# Altium PCB BEE-DAL_EXP_V1.0.PcbDoc (part 5 of 5)
Units mm, origin at the board's own origin, x right, y up, seen from the top; angles counter-clockwise.
Board outline 93 x 90 mm, 6 copper layers (L1_TOP, L2_GND, L3_SIGNAL, L4_PWR, L5_GND, L6_BOT), stack 1.608 mm thick; 548 components, 447 nets, 1827 pads, 1131 vias.
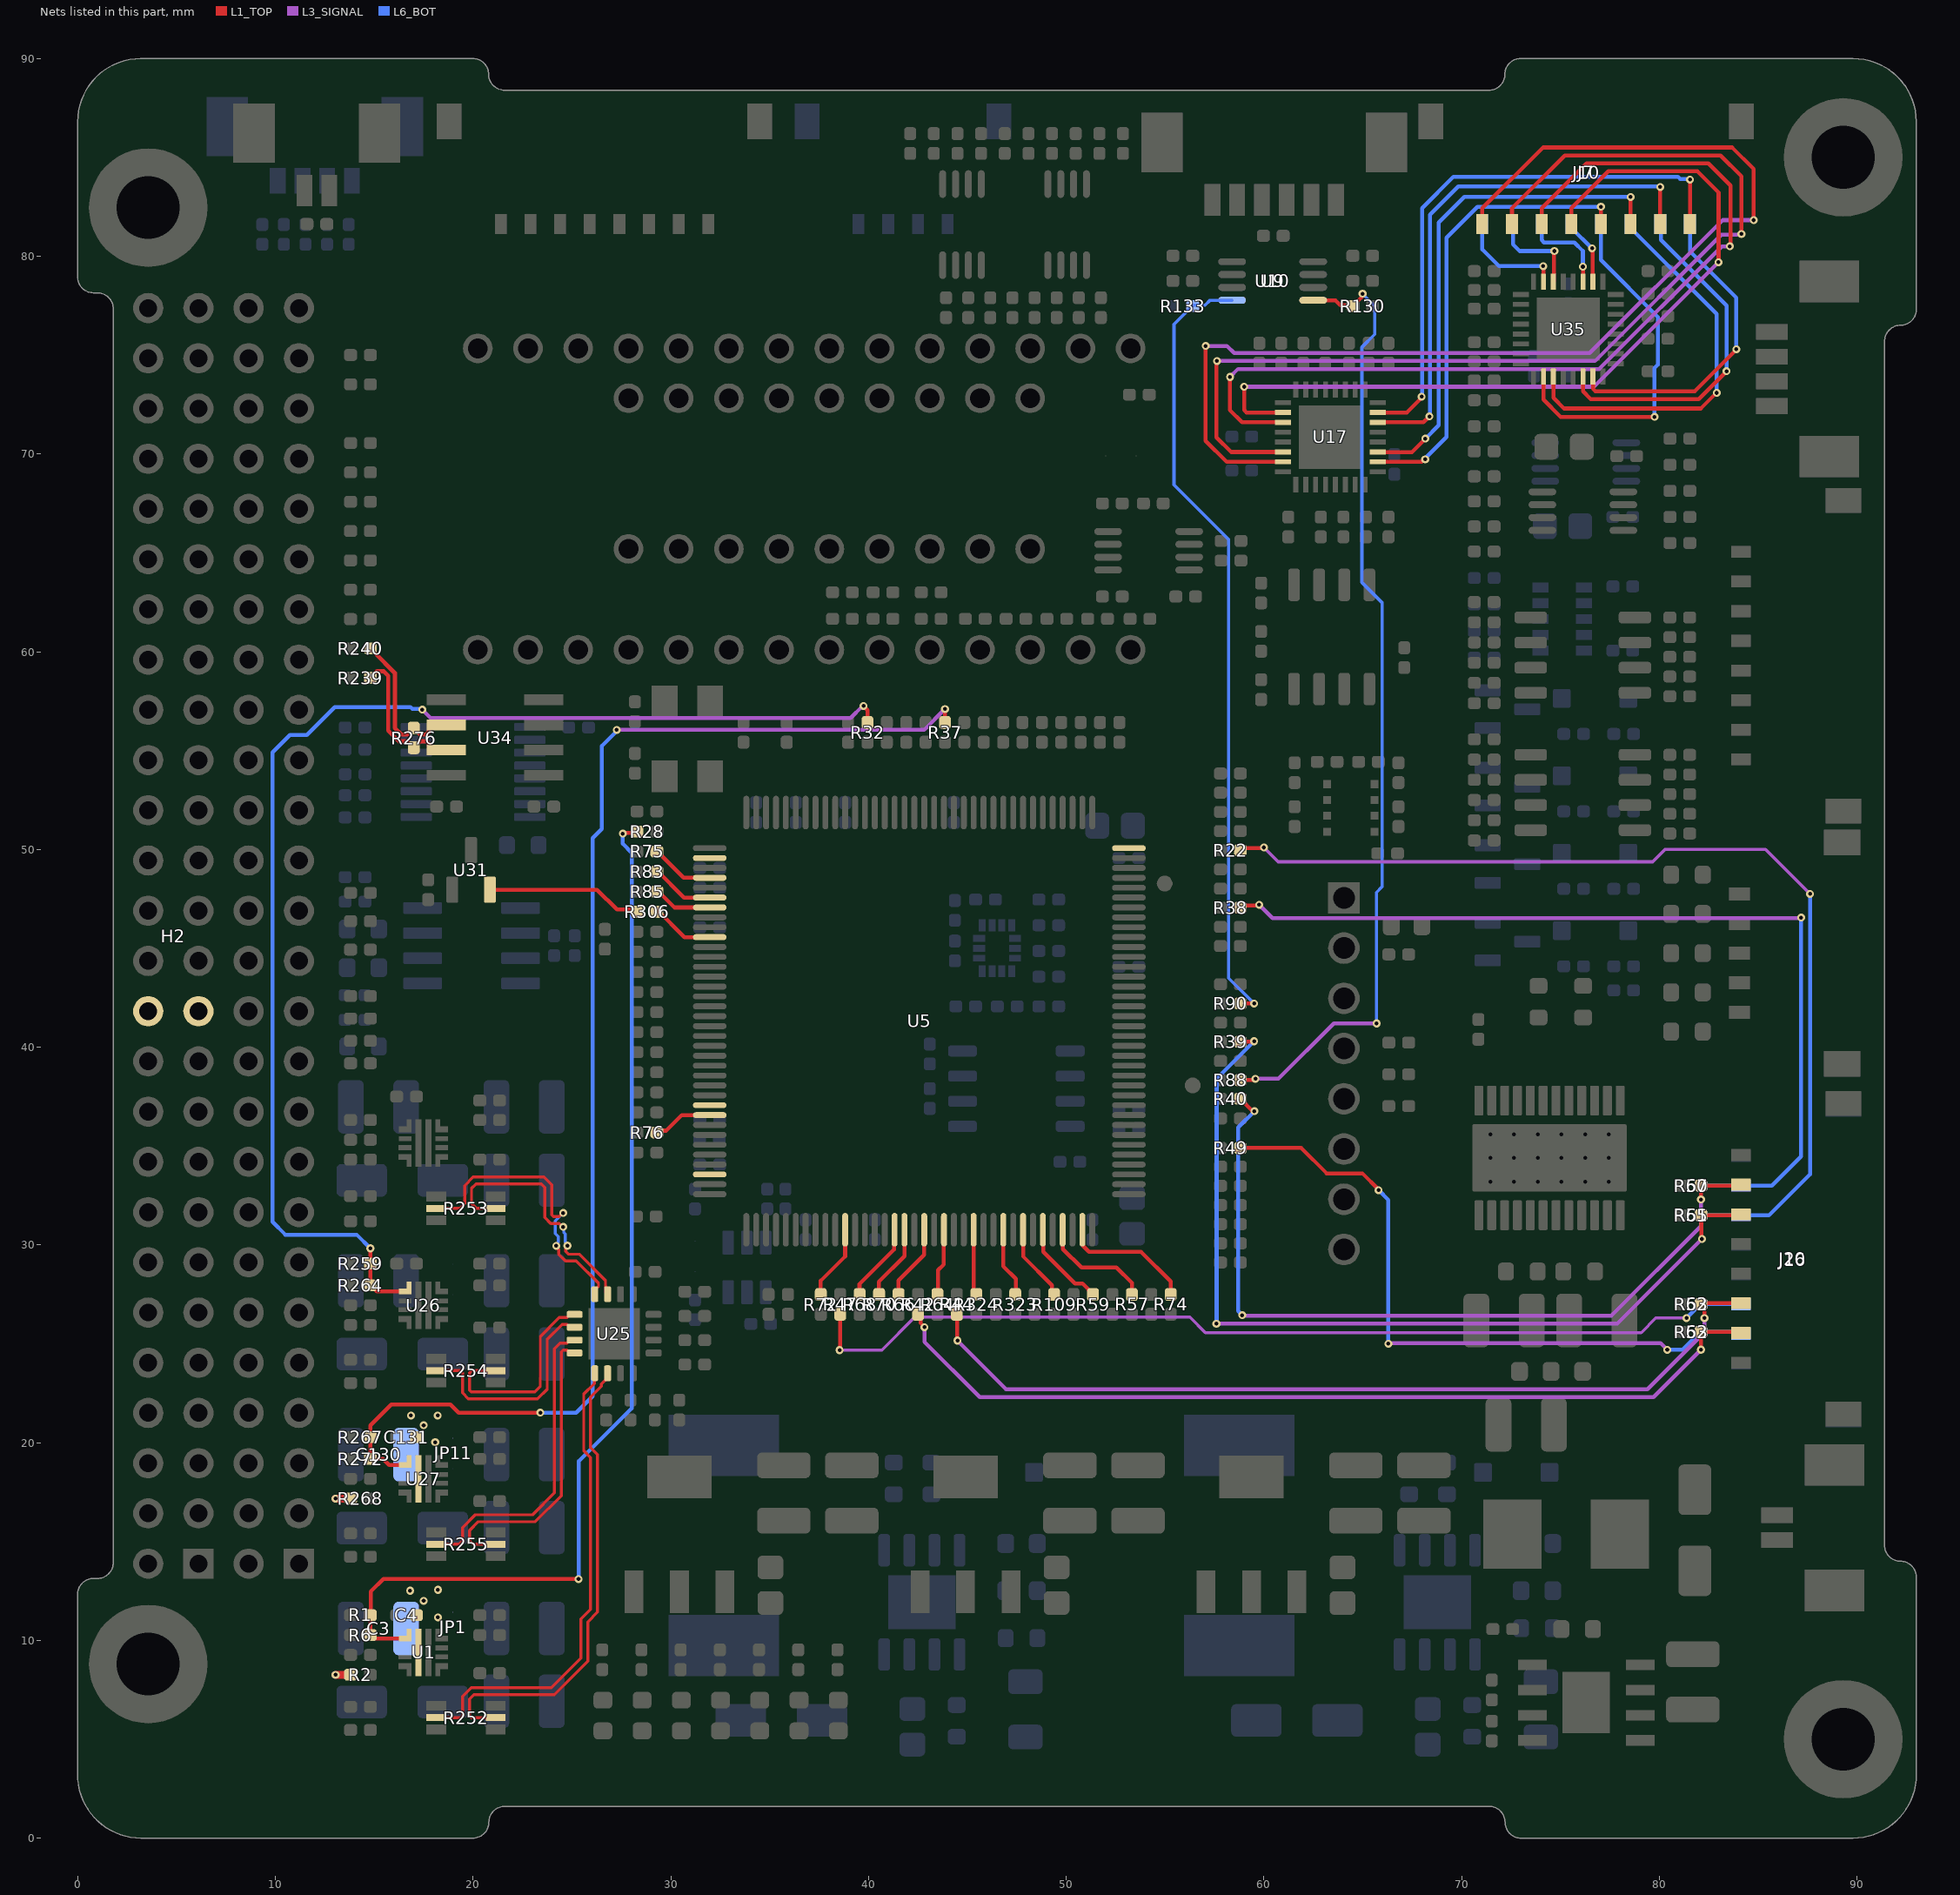
[diagram p9: the nets of this part, all layers, seen from the top]

## Via types
v1: diameter 0.4, hole 0.2, L1_TOP to L6_BOT, tented both sides, 1121 vias
v2: diameter 0.6, hole 0.3, L1_TOP to L6_BOT, tented both sides, 10 vias

## Nets (pads, with @x,y where several pads share a name; then routed paths per layer and width w, separated by ;. In a path a pad name is that pad's centre, name@x,y a point inside that pad or via, vN(x,y) a via of type N, cw(c..) or ccw(c..) an arc to the next point about the centre after c; other vN are vias at no path point) (continued)
PD18: R57.2 U5.69 | length 5.8
  L1_TOP w0.2: U5.69@49.822,30.764 49.841,30.745 49.841,29.786 50.772,28.855 52.545,28.855 53.324,28.076 R57.2@53.324,27.49
PD19: R59.1 U5.67 | length 4.5
  L1_TOP w0.2: U5.67@48.822,30.764 48.841,30.745 48.841,29.655 50.455,28.04 50.832,28.04 51.357,27.515 R59.1@51.357,27.49
PD20: R109.2 U5.65 | length 3.9
  L1_TOP w0.2: U5.65@47.822,30.764 47.822,29.419 49.289,27.951 49.289,27.591 R109.2@49.39,27.49
PD21: R323.2 U5.63 | length 3.5
  L1_TOP w0.2: U5.63@46.822,30.764 46.822,28.915 47.45,28.287 R323.2@47.45,27.49
PD22: R324.1 U5.60 | length 3.3
  L1_TOP w0.2: U5.60@45.322,30.764 45.322,27.625 R324.1@45.456,27.49
PD23: R64.2 U5.57 | length 3.4
  L1_TOP w0.2: R64.2@43.44,27.49 43.52,27.571 43.52,28.72 43.802,29.003 43.802,30.745 U5.57@43.822,30.764
PD24: R66.2 U5.55 | length 3.8
  L1_TOP w0.2: R66.2@41.522,27.49 41.522,28.192 42.822,29.491 U5.55@42.822,30.764
PD25: R68.2 U5.52 | length 4
  L1_TOP w0.2: R68.2@39.548,27.49 39.548,28.016 41.302,29.77 41.302,30.745 U5.52@41.322,30.764
PD26: R70.2 U5.53 | length 3.8
  L1_TOP w0.2: R70.2@40.529,27.49 40.529,28.141 41.822,29.434 U5.53@41.822,30.764
PD27: R72.2 U5.47 | length 3.8
  L1_TOP w0.2: R72.2@37.588,27.49 37.588,28.187 38.822,29.42 U5.47@38.822,30.764
PD28: R74.2 U5.71 | length 6.7
  L1_TOP w0.2: U5.71@50.822,30.764 50.841,30.745 50.841,29.966 51.152,29.655 53.784,29.655 55.291,28.148 R74.2@55.291,27.49
PD29: U5.108
PD30: U5.34
PD31: U5.2
PE00: R75.2 U5.4 | length 3.3
  L1_TOP w0.2: R75.2@29.283,49.927 30.646,48.564 U5.4@31.972,48.564
PE01: R83.2 U5.6 | length 3.3
  L1_TOP w0.2: R83.2@29.27,48.941 29.295,48.941 30.671,47.564 U5.6@31.972,47.564
PE02: R85.2 U5.7 | length 3.1
  L1_TOP w0.2: R85.2@29.27,47.951 29.295,47.951 30.182,47.064 U5.7@31.972,47.064
PE03: R306.2 U5.10 | length 3.3
  L1_TOP w0.2: R306.2@29.27,46.961 29.295,46.961 30.692,45.564 U5.10@31.972,45.564
PE04: U5.27
PE05: R76.2 U5.28 | length 3.1
  L1_TOP w0.2: R76.2@29.27,35.672 29.376,35.778 29.764,35.778 30.55,36.564 U5.28@31.972,36.564
PM-L25_1_DARK_ON: J20.3 R44.2 R63.1 | length 44.9
  L1_TOP w0.2: R44.2@44.472,26.49 44.486,26.477 44.486,25.174 v1(44.5,25.16) ; v1(82.284,26.3) 82.284,26.825 R63.1@82.109,27 82.157,27.048 J20.3@84.13,27.048
  L3_SIGNAL w0.2: v1(44.5,25.16) 46.96,22.7 79.4,22.7 82.284,25.584 v1(82.284,26.3)
PM-L25_1_LIGHT_ON: J20.2 R42.2 R62.1 | length 45.9
  L1_TOP w0.2: R42.2@42.506,26.49 42.63,26.366 42.63,26.053 42.827,25.856 v1(42.827,25.836) ; v1(82.109,24.7) R62.1@82.109,25.598 84.08,25.598 J20.2@84.13,25.548
  L3_SIGNAL w0.2: v1(42.827,25.836) 42.827,25.1 45.627,22.3 79.709,22.3 v1(82.109,24.7)
PM-L25_2_DARK_ON: J20.7 R40.1 R67.1 | length 40.9
  L1_TOP w0.2: R40.1@58.808,37.39 59.437,36.761 v1(59.523,36.761) ; v1(82.109,32.3) R67.1@82.109,33 84.082,33 J20.7@84.13,33.048
  L3_SIGNAL w0.2: v1(58.901,26.442) 58.918,26.425 77.581,26.425 82.109,30.953 v1(82.109,32.3)
  L6_BOT w0.2: v1(58.901,26.442) 58.901,26.459 58.7,26.659 58.7,35.939 v1(59.523,36.761)
PM-L25_2_LIGHT_ON: J20.6 R39.1 R65.1 | length 45.4
  L1_TOP w0.2: R39.1@58.808,40.27 59.474,40.27 v1(59.504,40.3) ; v1(82.157,30.3) 82.133,30.324 82.133,31.476 R65.1@82.109,31.5 84.082,31.5 J20.6@84.13,31.548
  L3_SIGNAL w0.2: v1(57.6,26.017) 77.874,26.017 v1(82.157,30.3)
  L6_BOT w0.2: v1(57.6,26.017) 57.612,26.029 57.612,38.408 v1(59.504,40.3)
PM-U25_1_DARK_ON: J16.3 R22.1 R51.1 | length 50.9
  L1_TOP w0.2: R22.1@58.808,49.962 58.907,50.062 59.962,50.062 v1(60,50.1)
  L3_SIGNAL w0.16: v1(60,50.1) 60.723,49.377 79.664,49.377 80.292,50.005 85.372,50.005 v1(87.625,47.752)
  L6_BOT w0.2: R51.1@82.109,31.5 J16.3@84.13,31.5 85.55,31.5 87.625,33.575 v1(87.625,47.752)
PM-U25_1_LIGHT_ON: J16.2 R38.1 R50.1 | length 46.5
  L1_TOP w0.2: R38.1@58.808,47.055 58.92,47.166 59.72,47.166 v1(59.758,47.205)
  L3_SIGNAL w0.2: v1(59.758,47.205) 60.438,46.525 87.143,46.525 v1(87.175,46.557)
  L6_BOT w0.2: R50.1@82.109,33 J16.2@84.13,33 85.7,33 87.175,34.475 v1(87.175,46.557)
PM-U25_2_DARK_ON: J16.7 R49.2 R53.1 | length 34.3
  L1_TOP w0.2: R49.2@58.808,34.9 61.894,34.9 63.174,33.62 64.981,33.62 65.8,32.801 v1(65.8,32.768)
  L3_SIGNAL w0.2: v1(66.3,25) 66.338,25.038 80.059,25.038 v1(80.405,24.692)
  L6_BOT w0.2: v1(65.8,32.768) 66.3,32.268 v1(66.3,25) ; v1(80.405,24.692) 80.413,24.7 81.186,24.7 82.084,25.598 R53.1@82.109,25.598 84.032,25.598 J16.7@84.13,25.5
PM-U25_2_LIGHT_ON: J16.6 R47.2 R52.1 | length 49
  L1_TOP w0.2: v1(38.541,24.678) 38.568,24.704 R47.2@38.568,26.49
  L3_SIGNAL w0.15: v1(38.541,24.678) 40.678,24.678 42.343,26.343 56.257,26.343 57.038,25.562 79.085,25.562 79.823,26.3 v1(81.38,26.3)
  L6_BOT w0.2: v1(81.38,26.3) 81.382,26.3 82.082,27 J16.6@84.13,27
POW_ONOFF_MOTOR: R37.1 R267.2 R272.1 U27.1 | length 67.7
  L1_TOP w0.2: U27.1@16.565,18.867 15.751,18.867 15.446,19.172 R272.1@14.805,19.172 R267.2@14.805,20.272 14.805,20.872 15.863,21.93 18.85,21.93 19.268,21.512 v1(23.4,21.512) ; v1(43.871,57.105) 43.871,56.641 43.978,56.534 R37.1@43.99,56.534
  L3_SIGNAL w0.2: v1(27.269,56.042) 42.809,56.042 v1(43.871,57.105)
  L6_BOT w0.2: v1(23.4,21.512) 25.212,21.512 26.044,22.344 26.044,50.572 26.509,51.037 26.509,55.229 27.269,55.988 v1(27.269,56.042)
POW_ONOFF_SLN_HD: R32.1 R259.2 R264.1 U26.1 | length 65.3
  L1_TOP w0.2: v1(14.805,29.825) R259.2@14.805,29.051 R264.1@14.805,27.951 14.83,27.951 15.135,27.646 U26.1@16.565,27.646 ; v1(39.748,57.254) 39.748,57.247 39.952,57.044 R32.1@39.952,56.42
  L3_SIGNAL w0.2: v1(17.431,57.068) 17.433,57.068 17.856,56.645 39.093,56.645 39.702,57.254 v1(39.748,57.254)
  L6_BOT w0.2: v1(14.805,29.825) 14.113,30.517 10.503,30.517 9.85,31.17 9.85,54.9 10.744,55.794 11.594,55.794 13,57.2 16.831,57.2 16.931,57.1 17.399,57.1 v1(17.431,57.068)
POW_ONOFF_STX_12V: R1.2 R6.1 R28.1 U1.1 | length 54.6
  L1_TOP w0.2: U1.1@16.565,10.091 15.02,10.091 14.844,10.268 R6.1@14.805,10.268 R1.2@14.805,11.273 14.835,11.303 14.835,12.475 15.46,13.1 v1(25.335,13.1) ; v1(27.576,50.8) 27.614,50.838 28.181,50.838 R28.1@28.27,50.927
  L6_BOT w0.2: v1(25.335,13.1) 25.355,13.12 25.355,19.069 28.025,21.739 28.025,49.831 27.576,50.28 v1(27.576,50.8)
RS_485_N: R239.1 R276.1 U34.7 | length 7.6
  L1_TOP w0.211: R239.1@14.805,58.68 14.814,58.68 15.148,59.015 15.477,59.015 15.708,58.783 15.708,56.007 16.243,55.471 16.682,55.471 R276.1@17,55.153 ; R276.1@17,55.14 R276.1@17,55.153 ; U34.7@18.654,55.025 17.934,55.025 17.769,55.19 17.769,55.347 17.645,55.471 17.318,55.471 R276.1@17,55.153
RS_485_P: R240.2 R276.2 U34.6 | length 7.9
  L1_TOP w0.211: R240.2@14.805,60.164 15.024,59.946 16.046,58.923 16.046,56.147 16.383,55.809 16.682,55.809 R276.2@17,56.127 ; R276.2@17,56.14 R276.2@17,56.127 ; U34.6@18.654,56.295 17.937,56.295 17.772,56.13 17.772,55.953 17.628,55.809 17.318,55.809 R276.2@17,56.127
SENSE_5V_EXP_N: R253.4 U25.7 | length 13.3
  L1_TOP w0.15: R253.4@21.143,31.846 20.164,31.846 19.923,32.088 19.923,32.857 20.152,33.086 23.447,33.086 23.633,32.9 23.633,31.38 23.926,31.087 24.347,31.087 24.524,30.91 v1(24.56,30.91) ; v1(24.775,29.959) 24.775,29.892 24.679,29.796 24.679,29.672 24.82,29.531 25.367,29.531 26.698,28.2 26.698,27.921 26.715,27.904 26.715,27.601 U25.7@26.808,27.508
  L6_BOT w0.15: v1(24.56,30.91) 24.588,30.882 24.588,30.637 24.667,30.557 24.667,30.134 24.775,30.027 v1(24.775,29.959)
SENSE_5V_EXP_P: R253.3 U25.8 | length 15.1
  L1_TOP w0.15: R253.3@18.143,31.846 19.332,31.846 19.573,32.088 19.573,33.002 20.007,33.436 23.592,33.436 23.983,33.045 23.983,31.525 24.071,31.437 24.347,31.437 24.524,31.614 v1(24.56,31.614) ; v1(24.21,29.954) 24.21,29.886 24.329,29.767 24.329,29.527 24.675,29.181 25.222,29.181 26.348,28.055 26.348,27.921 26.158,27.731 U25.8@26.158,27.508
  L6_BOT w0.15: v1(24.21,29.954) 24.21,30.021 24.317,30.129 24.317,30.412 24.16,30.569 24.16,31.214 v1(24.56,31.614)
SENSE_5V_MOTOR_N: R255.4 U25.12 | length 15.3
  L1_TOP w0.15: R255.4@21.143,14.859 19.993,14.859 19.818,15.034 19.818,15.559 20.259,16 23.155,16 24.464,17.309 24.464,24.595 24.551,24.683 24.751,24.683 24.901,24.533 U25.12@25.133,24.533
SENSE_5V_MOTOR_P: R255.3 U25.11 | length 15.9
  L1_TOP w0.15: R255.3@18.143,14.859 19.293,14.859 19.468,15.034 19.468,15.704 20.114,16.35 23.01,16.35 24.114,17.454 24.114,24.74 24.406,25.033 24.751,25.033 24.901,25.183 U25.11@25.133,25.183
SENSE_5V_SLN_HD_N: R254.4 U25.9 | length 10.7
  L1_TOP w0.15: R254.4@21.143,23.638 19.924,23.638 19.818,23.532 19.818,22.658 19.906,22.57 23.119,22.57 23.4,22.851 23.4,25.371 24.363,26.333 24.751,26.333 24.901,26.483 U25.9@25.133,26.483
SENSE_5V_SLN_HD_P: R254.3 U25.10 | length 11.3
  L1_TOP w0.15: R254.3@18.143,23.638 19.362,23.638 19.468,23.532 19.468,22.513 19.761,22.22 23.264,22.22 23.75,22.706 23.75,25.226 24.508,25.983 24.751,25.983 24.901,25.833 U25.10@25.133,25.833
SENSE_12V_EXP_N: R252.4 U25.14 | length 24.3
  L1_TOP w0.15: R252.4@21.143,6.09 19.906,6.09 19.818,6.178 19.818,7.026 20.047,7.255 24.105,7.255 25.801,8.951 25.801,10.928 26.297,11.425 26.297,19.397 25.947,19.747 25.947,22.305 26.486,22.843 26.486,22.956 26.808,23.277 U25.14@26.808,23.508
SENSE_12V_EXP_P: R252.3 U25.13 | length 24.1
  L1_TOP w0.15: R252.3@18.143,6.09 19.38,6.09 19.468,6.178 19.468,7.171 19.902,7.605 23.96,7.605 25.451,9.096 25.451,11.073 25.947,11.57 25.947,19.253 25.597,19.603 25.597,22.45 26.136,22.988 26.136,23.486 U25.13@26.158,23.508
SENSOR1_EN: R88.2 R130.1 U9.5 | length 49
  L1_TOP w0.2: R88.2@58.808,38.332 59.453,38.332 59.521,38.4 v1(59.575,38.4) ; U9.5@62.495,77.775 63.619,77.775 63.875,77.519 64.456,77.519 R130.1@64.5,77.475 64.955,77.93 64.955,78.062 v1(64.993,78.1)
  L3_SIGNAL w0.2: v1(59.575,38.4) 60.735,38.4 63.535,41.2 v1(65.7,41.2)
  L6_BOT w0.16: v1(64.993,78.1) 65.612,77.482 65.612,76.052 64.958,75.398 64.958,63.503 65.975,62.486 65.975,48.104 65.7,47.829 v1(65.7,41.2)
SENSOR2_EN: R90.2 R133.1 U10.5 | length 40.2
  L1_TOP w0.2: R90.2@58.808,42.209 v1(59.504,42.209)
  L6_BOT w0.16: U10.5@58.395,77.775 57.276,77.775 57.025,77.524 56.449,77.524 R133.1@56.4,77.475 56.375,77.475 55.456,76.556 55.456,68.444 58.22,65.68 58.22,43.493 v1(59.504,42.209)
SOLE1_OUT1: J10.1 U17.31 | length 28.6
  L1_TOP w0.2: U17.31@65.771,72.1 67.229,72.1 67.975,72.846 v1(67.975,72.9) ; J10.1@81.55,81.63 v1(81.55,83.875)
  L6_BOT w0.2: v1(67.975,72.9) 68,72.925 68,82.43 69.595,84.025 80.95,84.025 81.062,83.913 81.512,83.913 v1(81.55,83.875)
SOLE1_OUT2: J10.2 U17.30 | length 27.1
  L1_TOP w0.2: U17.30@65.771,71.6 68.075,71.6 v1(68.375,71.9) ; J10.2@80.05,81.63 v1(80.05,83.5)
  L6_BOT w0.2: v1(68.375,71.9) 68.4,71.925 68.4,82.1 69.838,83.538 80.012,83.538 v1(80.05,83.5)
SOLE2_OUT1: J10.3 U17.27 | length 25.5
  L1_TOP w0.2: U17.27@65.771,70.1 65.774,70.096 67.489,70.096 v1(68.168,70.775) ; J10.3@78.55,81.63 v1(78.55,83)
  L6_BOT w0.2: v1(68.168,70.775) 68.843,71.45 68.843,81.709 70.134,83 v1(78.55,83)
SOLE2_OUT2: J10.4 U17.26 | length 23.4
  L1_TOP w0.2: U17.26@65.771,69.6 67.978,69.6 68.105,69.727 v1(68.159,69.727) ; J10.4@77.05,81.63 v1(77.05,82.5)
  L6_BOT w0.2: v1(68.159,69.727) 68.159,69.778 69.243,70.863 69.243,80.942 70.802,82.5 v1(77.05,82.5)
SOLE3_OUT1: J10.5 U17.10 | length 42.8
  L1_TOP w0.2: v1(59,73.4) 59,72.217 59.117,72.1 U17.10@60.97,72.1 ; J10.5@75.55,81.63 75.55,82.43 77.42,84.3 81.924,84.3 83,83.224 v1(82.999,79.7) v1(82.999,79.7)
  L3_SIGNAL w0.2: v1(59,73.4) 76.699,73.4 v1(82.999,79.7)
SOLE3_OUT2: J10.6 U17.11 | length 47.5
  L1_TOP w0.2: v1(58.287,73.897) 58.287,72.213 58.9,71.6 U17.11@60.97,71.6 ; J10.6@74.05,81.63 74.05,82.43 76.32,84.7 82.476,84.7 83.6,83.576 83.6,80.535 v1(83.565,80.5)
  L3_SIGNAL w0.2: v1(58.287,73.897) 58.69,74.3 76.961,74.3 83.161,80.5 v1(83.565,80.5)
SOLE4_OUT1: J10.7 U17.14 | length 53.6
  L1_TOP w0.2: v1(57.625,74.7) 57.6,74.675 57.6,70.842 58.342,70.1 U17.14@60.97,70.1 ; J10.7@72.55,81.63 72.55,82.43 75.22,85.1 83.101,85.1 84.155,84.046 v1(84.155,81.13)
  L3_SIGNAL w0.2: v1(57.625,74.7) 76.75,74.7 83.142,81.092 84.117,81.092 v1(84.155,81.13)
SOLE4_OUT2: J10.8 U17.15 | length 58.7
  L1_TOP w0.2: v1(57.054,75.465) 57.054,70.665 58.119,69.6 U17.15@60.97,69.6 ; J10.8@71.05,81.63 71.05,82.43 74.12,85.5 83.684,85.5 84.78,84.404 v1(84.78,81.826)
  L3_SIGNAL w0.2: v1(57.054,75.465) 58.135,75.465 58.5,75.1 76.478,75.1 83.204,81.826 v1(84.78,81.826)
SOLE5_OUT1: J7.1 U35.31 | length 5.5
  L1_TOP w0.2: v1(74.127,79.496) 74.135,79.488 74.135,78.725 U35.31@74.143,78.717
  L6_BOT w0.2: J7.1@71.05,81.63 71.05,80.35 71.904,79.496 v1(74.127,79.496)
SOLE5_OUT2: J7.2 U35.30 | length 4.7
  L1_TOP w0.2: U35.30@74.643,78.717 74.669,78.742 74.669,80.239 v1(74.694,80.265)
  L6_BOT w0.2: J7.2@72.6,81.5 72.603,81.497 72.603,80.597 72.935,80.265 v1(74.694,80.265)
SOLE6_OUT1: J7.3 U35.27 | length 4.7
  L1_TOP w0.2: v1(76.135,79.471) 76.139,79.467 76.139,78.721 U35.27@76.143,78.717
  L6_BOT w0.2: J7.3@74.05,81.63 74.053,81.627 74.053,80.822 74.174,80.7 75.7,80.7 76.135,80.265 v1(76.135,79.471)
SOLE6_OUT2: J7.4 U35.26 | length 3.4
  L1_TOP w0.2: v1(76.6,80.4) 76.622,80.378 76.622,78.738 U35.26@76.643,78.717
  L6_BOT w0.2: J7.4@75.55,81.63 75.55,81.43 76.58,80.4 v1(76.6,80.4)
SOLE7_OUT1: J7.5 U35.10 | length 18.2
  L1_TOP w0.2: U35.10@74.143,73.916 74.143,72.746 75.015,71.875 v1(79.76,71.875)
  L6_BOT w0.2: J7.5@77.05,81.63 77.05,79.805 79.935,76.921 79.935,74.519 79.76,74.344 v1(79.76,71.875)
SOLE7_OUT2: J7.6 U35.11 | length 20.2
  L1_TOP w0.2: U35.11@74.643,73.916 74.643,72.833 75.176,72.3 82.1,72.3 82.891,73.091 v1(82.909,73.091)
  L6_BOT w0.2: J7.6@78.55,81.63 78.55,81.43 82.9,77.08 82.9,73.1 v1(82.909,73.091)
SOLE8_OUT1: J7.7 U35.14 | length 17.3
  L1_TOP w0.2: U35.14@76.143,73.916 76.143,73.167 76.532,72.778 81.995,72.778 v1(83.4,74.183)
  L6_BOT w0.2: J7.7@80.08,81.4 80.08,80.82 83.4,77.5 v1(83.4,74.183)
SOLE8_OUT2: J7.8 U35.15 | length 16.1
  L1_TOP w0.2: U35.15@76.643,73.916 76.643,73.295 76.761,73.178 81.794,73.178 83.9,75.284 v1(83.9,75.3)
  L6_BOT w0.2: J7.8@81.55,81.63 81.55,80.25 83.9,77.9 v1(83.9,75.3)
STX_12V: C3.2 C4.2 C130.2 C131.2 H2.23 H2.24 JP1.1 JP11.1 R2.2 R268.2 U1.5 U27.5 | length 1.5
  L1_TOP w0.4: v1(13.04,17.172) R268.2@13.805,17.172 ; v1(13.045,8.258) R2.2@13.805,8.258
  other v1: 18.224,11.163 17.503,12 16.815,12.51 18.224,12.557 18.087,20.016 17.503,20.875 16.859,21.373 18.212,21.373
"TEMP _SENSOR": R306.1 U31.2 | length 7.8
  L1_TOP w0.2: U31.2@20.85,47.962 26.273,47.962 27.274,46.961 R306.1@28.27,46.961
pads on no net: H1.02 H1.04 H1.05 H1.06 H1.07 H1.08 H1.09 H1.10 H1.11 H1.12 H1.13 H1.14 H1.15 H1.16 H1.17 H1.18 H1.19 H1.20 H1.28 H1.29 H1.30 H1.31 H1.32 H1.33 H1.34 H1.35 H1.36 H1.40 H1.42 H1.45 H1.48 H1.50 H1.51 H1.52 H2.01 H2.02 H2.03 H2.04 H2.05 H2.06 H2.07 H2.08 H2.09 H2.10 H2.11 H2.12 H2.13 H2.14 H2.15 H2.16 H2.17 H2.18 H2.19 H2.20 H2.21 H2.22 H2.27 H2.28 H2.33 H2.34 H2.35 H2.36 H2.37 H2.38 H2.39 H2.40 H2.41 H2.42 H2.43 H2.44 H2.45 H2.46 H2.49 H2.50 H2.51 H2.52 J2.1 J2.7 J4.6 J5.6 U4.7 U4.9 U5.136 U5.137 U7.8 U7.10 U11.1 U11.2 U11.4 U11.5 U11.6 U11.17 U11.18 U14.4 U14.10 U14.11 U15.23 U15.24 U15.25 U15.26 U17.8 U17.17 U18.4 U19.4 U20.17 U20.18 U33.2 U33.3 U33.5 U35.8 U35.17

## Polygon pours and split planes (outlines as drawn)
GND on L1_TOP "L1_GND" (solid, remove dead copper, pour order 265): 0,12.33 cw(c0.8,12.33) 0.8,13.13 1,13.13 ccw(c1,13.93) 1.8,13.93 1.8,77.35 ccw(c1,77.35) 1,78.15 0.8,78.15 cw(c0.8,78.95) 0,78.95 0,86.8 cw(c3.2,86.8) 3.193,90 3.175,90 19.989,90 cw(c19.989,89.2) 20.789,89.2 ccw(c21.589,89.2) 21.589,88.4 21.59,88.399 42.015,88.4 71.399,88.4 71.389,88.4 ccw(c71.389,89.2) 72.189,89.2 cw(c72.989,89.2) 72.989,90 89.789,90 89.807,90 cw(c89.8,86.8) 93,86.807 93,77.307 cw(c92.2,77.307) 92.2,76.507 ccw(c92.2,75.707) 91.4,75.707 91.4,14.8 ccw(c92.2,14.8) 92.2,14 cw(c92.2,13.2) 93,13.2 93,3.2 cw(c89.8,3.2) 89.8,0 73,0 cw(c73,0.8) 72.2,0.8 ccw(c71.4,0.8) 71.4,1.6 71.399,1.6 50.975,1.6 21.59,1.6 21.6,1.6 ccw(c21.6,0.8) 20.8,0.8 cw(c20,0.8) 20,0 3.2,0 cw(c3.2,3.2) 0,3.2
12V_EXP on L1_TOP "NONET_L-01_P-001" (solid, pour order 87): 20.643,6.94 22.66,6.94 cw(c22.66,6.512) 23.088,6.512 23.088,4.618 cw(c22.69,4.618) 22.69,4.22 20.952,4.22 cw(c20.952,4.529) 20.643,4.529
5V_SLN_HD on L1_TOP "NONET_L-01_P-001" (solid, pour order 129): 20.643,23.988 20.643,24.488 23.122,24.488 23.18,24.43 23.18,22.909 23.058,22.788 20.643,22.788 20.643,23.288 21.843,23.288 21.843,23.988
GND on L1_TOP "NONET_L-01_P-001" (solid, pour order 231): 70.928,36.1 70.1,36.1 70.1,40.119 68.064,40.119 68.064,36.032 66.601,36.032 66.601,31.1 68.136,31.1 68.136,25.6 70,25.6 70,27.464 71.101,28.565 71.101,32.561 77.818,32.561 77.818,30.766 80.2,30.766 80.2,34.6 81,35.4 84.8,35.4 85.6,35.4 85.6,38.2 77.984,38.2 77.801,38.017 77.801,36.606 77.801,36.1
5V_EXP on L1_TOP "NONET_L-01_P-001" (solid, pour order 124): 46.735,13.533 46.735,11.383 48.667,11.383 49.65,10.4 51.7,10.4 51.7,13 48.217,13 47.685,13.533
5V_EXP on L1_TOP "NONET_L-01_P-001" (solid, pour order 125): 32.261,13.533 32.261,11.383 34.085,11.383 cw(c34.085,11.122) 34.27,11.306 34.315,11.261 ccw(c35.041,11.987) 35.041,10.96 40.46,10.96 40.46,12.784 34.487,12.784 cw(c34.487,14.056) 33.587,13.156 33.211,13.533
BUS_5V on L1_TOP "NONET_L-01_P-001" (solid, pour order 130): 17.388,33.937 17.088,33.937 17.088,36.445 16.64,36.893 16.64,40.03 19.469,40.03 19.469,37.695 18.492,36.718 17.557,36.718 17.388,36.548
STX_12V on L1_TOP "NONET_L-01_P-001" (solid, pour order 94): 17.388,8.191 17.088,8.191 17.088,10.7 16.619,11.168 16.619,12.77 18.516,12.77 18.516,10.997 18.492,10.973 17.557,10.973 17.388,10.803
efuse_BUS_5V on L1_TOP "NONET_L-01_P-001" (solid, pour order 122): 17.588,36.349 17.588,33.764 16.595,32.771 14.387,32.771 14.305,32.689 14.305,30.896 18.643,30.896 18.643,31.496 17.443,31.496 17.443,32.196 18.643,32.196 18.643,32.708 17.888,33.464 17.888,36.349
GND on L1_TOP "NONET_L-01_P-001" (solid, pour order 236): 7.875,87.022 7.875,89 9.975,89 9.975,87.022
GND on L1_TOP "NONET_L-01_P-001" (solid, pour order 237): 14.225,87.022 14.225,89 16.325,89 16.325,87.022
GND on L1_TOP "NONET_L-01_P-001" (solid, pour order 240): 18.17,87.62 18.17,89.599 19.42,89.599 19.42,87.62
5V_MOTOR on L1_TOP "NONET_L-01_P-001" (solid, pour order 220): 61.2,13.536 62.611,13.536 63.447,12.7 68.46,12.7 70.7,14.94 70.7,17.418 73.382,20.1 73.382,21.688 71.792,23.278 71.792,24.285 73.595,24.285 73.595,23.404 74.199,22.8 82.682,22.8 83.63,23.748 83.63,24.348 84.63,24.348 85.1,24.818 85.1,29.3 84.652,29.748 83.63,29.748 83.63,30.348 84.648,30.348 85,30.7 85,34.848 86.2,34.848 86.2,22.1 84.9,20.8 77.669,20.8 74.682,17.813 74.682,13.682 73.78,12.78 72.1,11.1 72.1,7.49 70.331,7.49 66.92,10.9 61.2,10.9
12V/5V_MOTOR on L1_TOP "NONET_L-01_P-001" (solid, pour order 251): 72.657,32.25 72.995,32.25 73.051,32.194 73.051,30.094 73.854,29.291 75.037,29.291 75.851,30.105 75.851,32.194 75.907,32.25 76.245,32.25 76.301,32.194 76.301,29.456 75.907,29.062 75.907,27.891 76.301,27.497 76.301,24.865 76.036,24.6 75.345,24.6 75.07,24.325 75.07,23.215 74.981,23.125 74.06,23.125 73.99,23.195 73.99,24.356 73.746,24.6 72.945,24.6 72.716,24.829 72.716,27.487 73.051,27.823 73.051,28.997 72.601,29.447 72.601,32.194
12V_MOTOR on L1_TOP "NONET_L-01_P-001" (solid, pour order 206): 75.487,24.185 79.729,24.185 79.729,23.015 75.487,23.015
GND on L1_TOP "NONET_L-01_P-001" (solid, pour order 248): 89.363,11.475 89.362,11.476 89.362,13.575 91.913,13.575 91.919,13.569 91.919,11.475
GND on L1_TOP "NONET_L-01_P-001" (solid, pour order 247): 89.101,77.672 89.1,77.673 89.1,79.771 91.652,79.772 91.657,79.766 91.657,77.672
GND on L1_TOP "NONET_L-01_P-001" (solid, pour order 242): 83.53,87.6 83.53,89.578 84.78,89.578 84.78,87.6
NetC19_1 on L1_TOP "NONET_L-01_P-001" (solid, pour order 202): 83.049,14.529 82.216,15.362 80.252,15.362 79.49,16.124 79.49,17.3 75.6,17.3 75.6,10.581 77.694,8.487 79.764,8.487 79.764,11.001 80.763,12 83.049,12
12V_MOTOR on L1_TOP "NONET_L-01_P-001" (solid, pour order 117): 80.133,7.196 80.844,7.906 cw(c81.215,7.536) 81.215,8.06 84.33,8.06 84.33,11.3 80.196,11.3 80.196,8.882 cw(c79.587,8.882) 80.017,8.451 79.851,8.285 cw(c79.525,8.611) 79.525,8.15 78.25,8.15 ccw(c78.25,8.01) 78.11,8.01 78.11,7.341 ccw(c78.376,7.341) 78.376,7.076 79.844,7.076 ccw(c79.844,7.485)
GND on L1_TOP "NONET_L-01_P-001" (solid, pour order 118): 78.304,5.947 79.958,5.947 cw(c79.958,5.219) 80.473,5.733 80.841,5.365 ccw(c81.481,6.005) 81.481,5.1 82.783,5.1 ccw(c82.783,5.885) 83.338,5.33 83.421,5.413 ccw(c82.892,5.941) 83.64,5.941 83.64,6.931 ccw(c83.203,6.933) 83.203,7.37 80.951,7.37 ccw(c80.951,6.649) 80.441,7.159 79.809,6.527 cw(c79.696,6.64) 79.696,6.48 78.304,6.48
3.3V_MCU on L1_TOP "L1 TOP-3.3V_MCU" (solid, pour order 136): 49.614,17.85 54.386,17.85 ccw(c54.386,18.438) 54.974,18.438 54.974,20.766 ccw(c54.58,20.766) 54.58,21.16 48.662,21.16 ccw(c48.662,20.037) 47.867,20.831 47.473,20.437 cw(c44.816,23.094) 44.816,19.336 43.288,19.336 43.288,15.421 ccw(c45.062,15.421) 43.808,14.167 44.066,13.909 cw(c43.168,13.01) 44.438,13.01 44.438,11.386 45.388,11.386 45.388,12.957 cw(c46.806,12.957) 45.542,13.598 ccw(c42.467,16.673) 46.675,15.578 cw(c49.614,14.814)
GND on L1_TOP "NONET_L-01_P-001" (solid, pour order 188): 52.737,13.087 54.986,15.336 54.986,16.558 54.841,16.703 48.985,16.703 48.841,16.558 48.841,15.547 48.841,13.358 49.112,13.087
GND on L1_TOP "NONET_L-01_P-001" (solid, pour order 189): 63.302,16.261 63.302,16.558 63.447,16.703 69.303,16.703 69.447,16.558 69.447,15.65 69.447,15.17 68.806,14.528 66.771,14.528 65.33,13.087 63.573,13.087 63.327,13.333
GND on L1_TOP "NONET_L-01_P-001" (solid, pour order 187): 40.127,13.087 40.512,13.472 40.512,16.456 40.265,16.703 34.511,16.703 34.367,16.558 34.367,15.547 34.439,15.475 34.392,15.427 34.392,13.333 34.638,13.087
3.3V_MOTOR on L1_TOP "L1 TOP-3.3V_MCU" (solid, pour order 162): 62.334,17.186 62.998,17.85 69.436,17.85 69.436,20.62 62.118,20.62 60.836,19.337 60.837,19.336 57.75,19.336 57.75,14.686 58.9,13.536 58.9,11.386 59.85,11.386 59.85,13.544 61,14.694 61,17.186
3.3V_COM on L1_TOP "L1 TOP-3.3V_COM" (solid, pour order 135): 33.399,17.186 34.415,18.203 39.563,18.203 ccw(c39.563,19.14) 40.5,19.14 40.5,21.4 ccw(c39.65,21.4) 39.65,22.25 34.813,22.25 31.9,19.337 31.901,19.336 28.814,19.336 28.814,14.686 29.964,13.536 29.964,11.386 30.914,11.386 30.914,13.544 32.064,14.694 32.064,17.186
5V_EXP on L1_TOP "NONET_L-01_P-001" (solid, pour order 132): 20.643,32.696 22.904,32.696 cw(c22.904,32.22) 23.38,32.22 23.38,30.225 cw(c22.682,30.225) 23.176,29.731 cw(c22.619,30.288) 22.619,29.501 20.309,29.501 ccw(c20.309,28.492) 19.596,29.205 19.367,28.976 cw(c18.266,30.077) 18.266,28.52 16.815,28.52 16.64,28.695 16.64,29.744 16.802,29.906 cw(c17.656,29.053) 17.656,30.26 18.189,30.26 ccw(c18.189,31.519) 19.08,30.629 19.457,31.006 cw(c20.641,29.822) 20.641,31.496 21.836,31.496 ccw(c21.836,31.667) 22.007,31.667 22.007,31.952 ccw(c21.762,31.952) 21.762,32.196 20.643,32.196
12V_MOTOR on L1_TOP "NONET_L-01_P-001" (solid, pour order 131): 20.643,15.709 22.741,15.709 23.01,15.44 23.01,14.009 20.643,14.009 20.643,14.509 21.843,14.509 21.843,15.209 20.643,15.209
efuse_STX_12V on L1_TOP "NONET_L-01_P-001" (solid, pour order 91): 17.588,10.592 17.588,8.008 16.52,6.94 14.312,6.94 14.305,6.933 14.305,5.185 14.86,4.63 18.643,4.63 18.643,5.74 17.443,5.74 17.443,6.44 18.643,6.44 18.643,6.952 17.888,7.708 17.888,10.592
5V_SLN_HD_eFuse on L1_TOP "NONET_L-01_P-001" (solid, pour order 103): 17.588,28.14 17.588,25.555 16.52,24.488 14.312,24.488 14.305,24.48 14.305,22.733 14.838,22.2 18.552,22.2 18.643,22.291 18.643,23.288 17.443,23.288 17.443,23.988 18.643,23.988 18.643,24.5 17.888,25.255 17.888,28.14
5V_EXP on L1_TOP "NONET_L-01_P-001" (solid, pour order 104): 17.388,25.739 17.088,25.739 17.088,28.247 16.64,28.695 16.64,29.571 cw(c17.056,29.571) 17.056,29.988 18.3,29.988 18.516,29.771 18.516,28.545 18.492,28.52 17.557,28.52 17.388,28.351
STX_12V on L1_TOP "NONET_L-01_P-001" (solid, pour order 102): 17.388,16.96 17.088,16.96 17.088,19.468 16.64,19.916 16.64,21.6 18.516,21.6 18.516,19.766 18.492,19.741 17.557,19.741 17.388,19.572
12V_MOTOR_eFuse on L1_TOP "NONET_L-01_P-001" (solid, pour order 101): 17.588,19.361 17.588,16.776 16.52,15.709 14.312,15.709 14.305,15.701 14.305,13.954 14.835,13.423 18.555,13.423 18.643,13.512 18.643,14.509 17.443,14.509 17.443,15.209 18.643,15.209 18.643,15.721 17.888,16.476 17.888,19.361
STX_12V on L4_PWR "NONET_L-01_P-001" (solid, pour order 120): 2.19,43 11.995,43 14.805,40.19 14.805,25.342 21.4,18.747 21.4,7.133 11.327,7.133 cw(c11.327,9.837) 9.415,7.925 7.81,9.53 3.039,14.301 cw(c5.09,16.351) 2.19,16.351
5V_EXP on L4_PWR "L4 PWR-5V_EXP" (solid, pour order 227): 13.4,68.8 13.4,48.3 20.7,41 20.7,31.4 15.1,31.4 15.1,25.38 23.48,17 23.48,12.17 25.15,10.5 52.359,10.5 54.238,10.5 62.6,18.862 62.6,53.517 54.5,61.617 54.5,63.13 52.83,63.13 52.73,63.029 52.73,60.18 61.612,51.297 61.612,19.512 55.557,13.457 31.464,13.457 22.007,22.914 22.007,30.895 22.007,41.193 14.6,48.6 14.6,68.8
BUS_5V on L4_PWR "NONET_L-01_P-001" (solid, pour order 121): 2.19,43.33 2.19,48.4 13.15,48.4 20.6,40.95 20.6,31.6 15.1,31.6 15.1,40.22 11.99,43.33
3.3V_COM on L4_PWR "L4 PWR-3.3V_COM" (solid, pour order 184): 22.26,27.14 31.5,17.9 39.78,17.9 39.78,21.73 ccw(c39.26,21.73) 39.26,22.25 34.367,22.25 30.72,22.25 26.3,26.67 26.3,52.5 18.73,52.5 18.3,52.5 18.3,45.2 22.26,41.24
3.3V_MCU on L4_PWR "L4_PWR-3.3V_MCU" (solid, pour order 264): 62.8,40.496 67.448,40.496 68.4,41.448 69.852,42.9 76.648,42.9 76.7,42.952 76.7,55.6 79.4,58.3 84.325,58.3 86.263,60.238 86.263,65.663 86.4,65.8 88.6,65.8 88.6,80.2 82.4,86.4 18.8,86.4 14.8,82.4 8.109,82.4 8.109,80.68 13.4,75.389 13.4,69 14.805,69 14.805,48.624 18.2,45.229 18.2,52.7 26.5,52.7 26.5,26.762 30.862,22.4 40,22.4 40,17.9 51.98,17.9 55,20.92 55,50.538 52.838,52.7 41.9,63.638 41.9,76.23 46.37,80.7 54.123,80.7 58.733,76.09 68.753,76.09 73.263,80.6 79.3,80.6 79.5,80.4 79.5,72.8 79.3,72.6 67.275,72.6 67.2,72.525 67.2,67.175 67.2,67.02 54.7,67.02 54.7,61.767 62.8,53.667
3.3V_MOTOR on L4_PWR "L4 PWR-3.3V_MOTOR" (solid, pour order 222): 70.5,19.5 73.6,22.6 76,25 83.1,25 83.1,36.27 76.57,42.8 70,42.8 68.6,41.4 67.5,40.3 62.8,40.3 62.8,19.5
12V_EXP on L4_PWR "L4 PWR-12V_EXP" (solid, pour order 218): 21.135,3.6 86.04,3.6 86.04,5.696 89.1,8.756 89.1,65.6 86.4,65.6 86.4,60.2 85.25,59.05 84.3,58.1 79.4,58.1 76.9,55.6 76.9,42.8 83.3,36.4 83.3,14.61 83.3,10.3 79.94,6.94 22.33,6.94 21.135,6.94
5V_SLN_HD on L4_PWR "L4 PWR-5V_SLN_HD" (solid, pour order 233): 22.1,23.1 31.6,13.6 54.931,13.6 ccw(c54.931,14.854) 55.817,13.967 61.5,19.65 61.5,51.257 52.51,60.247 52.51,63.353 54.5,63.353 54.5,67.175 67.1,67.175 67.1,72.8 79.3,72.8 79.3,80.4 73.3,80.4 68.8,75.9 58.565,75.9 53.965,80.5 46.6,80.5 42.2,76.1 42.2,63.7 55.16,50.74 55.16,20.66 52.18,17.68 31.42,17.68 22.1,27
+VDDCORE on L4_PWR "NONET_L-01_P-001" (solid, pour order 253): 41.1,34.3 35.812,34.3 35.6,34.512 35.6,40.2 44.1,48.7 49.907,48.7 50.145,48.462 50.145,36.372 53,36.372 53,49.638 50.938,51.7 34.036,51.7 32.2,49.864 32.2,32.8 33.7,31.3 41.1,31.3
12V_MOTOR on L4_PWR "L4 PWR-12V_MOTOR" (solid, pour order 208): 21.6,7.22 79.789,7.22 83.1,10.531 83.1,24.692 79.2,24.692 76.007,24.701 73.8,22.5 70.5,19.2 63.259,19.2 54.309,10.25 24.85,10.25 23.24,11.86 23.24,17.18 21.6,17.18
GND on L6_BOT "L6_GND" (solid, remove dead copper, pour order 266): 0,12.33 cw(c0.8,12.33) 0.8,13.13 1,13.13 ccw(c1,13.93) 1.8,13.93 1.8,77.35 ccw(c1,77.35) 1,78.15 0.8,78.15 cw(c0.8,78.95) 0,78.95 0,86.8 cw(c3.2,86.8) 3.193,90 3.175,90 19.989,90 cw(c19.989,89.2) 20.789,89.2 ccw(c21.589,89.2) 21.589,88.4 21.59,88.399 42.015,88.4 71.399,88.4 71.389,88.4 ccw(c71.389,89.2) 72.189,89.2 cw(c72.989,89.2) 72.989,90 89.789,90 89.807,90 cw(c89.8,86.8) 93,86.807 93,77.307 cw(c92.2,77.307) 92.2,76.507 ccw(c92.2,75.707) 91.4,75.707 91.4,14.8 ccw(c92.2,14.8) 92.2,14 cw(c92.2,13.2) 93,13.2 93,3.2 cw(c89.8,3.2) 89.8,0 73,0 cw(c73,0.8) 72.2,0.8 ccw(c71.4,0.8) 71.4,1.6 71.399,1.6 50.975,1.6 21.59,1.6 21.6,1.6 ccw(c21.6,0.8) 20.8,0.8 cw(c20,0.8) 20,0 3.2,0 cw(c3.2,3.2) 0,3.2
BUS_5V on L6_BOT "NONET_L-01_P-001" (solid, pour order 100): 15.51,38.749 15.51,35.516 ccw(c15.673,35.515) 15.673,35.352 17.891,35.352 ccw(c17.891,35.686) 18.224,35.686 18.224,36.93 cw(c18.608,36.93) 18.337,37.201 18.385,37.25 cw(c18.516,37.119) 18.647,37.25 18.988,36.909 18.991,36.909 19.46,37.378 cw(c19.466,37.372) 19.475,37.372 19.475,40.03 16.791,40.03
IR_LED_1_GND on L6_BOT "L6 BOT-IR_LED_1_GND" (solid, pour order 154): 29.886,18.305 43.781,18.305 cw(c43.782,17.757) 44.17,18.144 ccw(c44.784,18.758) 44.784,17.89 45.511,17.89 ccw(c45.511,19.093) 46.363,18.243 47.131,19.011 cw(c47.611,18.532) 47.611,19.21 49.949,19.21 cw(c49.95,18.703) 50.309,19.061 51.364,18.006 cw(c51.035,17.678) 51.5,17.677 51.5,8.8 ccw(c51.761,8.8) 51.761,8.539 53.91,8.539 53.91,9.172 52.68,9.172 cw(c52.68,9.39) 52.462,9.39 52.462,18.046 ccw(c51.757,18.046) 52.255,18.545 50.92,19.88 ccw(c50.462,19.423) 50.461,20.07 40.633,20.07 37.346,20.07 cw(c37.346,21.369) 36.427,20.451 35.474,21.404 29.886,21.404
IR_LED_1_P on L6_BOT "NONET_L-01_P-001" (solid, pour order 115): 47.922,18.017 49.2,16.739 49.2,9.08 48.655,8.535 47.21,8.535 ccw(c47.209,8.392) 47.067,8.392 47.067,7.428 ccw(c47.21,7.428) 47.21,7.285 49.966,7.285 ccw(c49.966,7.519) 50.2,7.519 50.2,18.535 49.768,18.967 47.98,18.967 ccw(c47.98,18.909) 47.922,18.909
NetD4_2 on L6_BOT "NONET_L-01_P-001" (solid, pour order 109): 42.362,8.554 42.275,8.467 36.915,8.467 ccw(c36.915,7.264) 36.063,8.115 35.118,7.169 ccw(c35.824,6.463) 34.825,6.463 34.825,5.387 cw(c34.556,5.387) 34.746,5.196 cw(c34.578,5.365) 34.578,5.126 32.523,5.126 cw(c32.522,5.374) 32.347,5.199 30.276,7.271 cw(c31.216,8.211) 29.886,8.211 29.886,11.295 39.1,11.295 cw(c39.1,10.42) 39.718,11.039 40.398,10.359 ccw(c41.004,10.965) 41.004,10.107 42.214,10.107 cw(c42.214,9.96) 42.319,10.064 cw(c42.214,9.96) 42.362,9.96
STX_12V on L6_BOT "NONET_L-01_P-001" (solid, pour order 93): 18.991,10.526 19.463,10.997 19.466,10.997 19.466,11.64 ccw(c18.855,11.64) 19.287,12.073 18.779,12.581 ccw(c18.323,12.125) 18.323,12.77 16.476,12.77 ccw(c16.476,12.153) 15.859,12.153 15.859,8.817 15.625,8.583 12.919,8.583 12.74,8.404 12.74,8.187 12.925,8.002 16.182,8.002 18.224,10.045 18.224,10.705 18.516,10.997 18.988,10.526 18.995,10.526 19.466,10.997
efuse_BUS_5V on L6_BOT "NONET_L-01_P-001" (solid, pour order 99): 18.516,37.132 18.516,35.32 15.84,32.644 15.84,31 21.603,31 22.14,31.537 22.14,38.006 21.814,38.332 20.662,38.332 18.989,36.659
GND on L6_BOT "NONET_L-01_P-001" (solid, pour order 249): 89.363,13.575 89.362,13.574 89.362,11.475 91.913,11.475 91.919,11.481 91.919,13.575
GND on L6_BOT "NONET_L-01_P-001" (solid, pour order 246): 89.101,79.772 89.1,79.771 89.1,77.672 91.652,77.672 91.657,77.677 91.657,79.772
GND on L6_BOT "NONET_L-01_P-001" (solid, pour order 243): 84.78,87.62 84.78,89.599 83.53,89.599 83.53,87.62
GND on L6_BOT "NONET_L-01_P-001" (solid, pour order 241): 19.42,87.62 19.42,89.599 18.17,89.599 18.17,87.62
GND on L6_BOT "NONET_L-01_P-001" (solid, pour order 239): 15.374,87.411 15.374,89.389 17.474,89.389 17.474,87.411
GND on L6_BOT "NONET_L-01_P-001" (solid, pour order 238): 6.524,87.411 6.524,89.389 8.624,89.389 8.624,87.411
IR_LED_2_P on L6_BOT "L6 BOT-IR_LED_2_P" (solid, pour order 157): 66.902,17.107 67.019,16.99 68.039,16.99 cw(c68.039,16.212) 68.59,16.762 cw(c67.327,15.499) 69.114,15.498 69.114,13.885 ccw(c69.261,13.885) 69.157,13.781 ccw(c69.261,13.885) 69.261,13.738 69.617,13.738 69.704,13.824 69.704,15.23 69.712,15.238 69.712,16.19 69.937,16.414 72.675,16.414 ccw(c72.675,17.542) 73.472,16.744 74.543,17.815 cw(c74.834,17.524) 75.056,17.871 cw(c74.562,17.097) 75.213,17.745 75.35,17.608 cw(c74.772,17.029) 75.59,17.028 75.59,9.719 cw(c74.817,9.719) 75.363,9.172 74.949,8.758 cw(c74.412,9.294) 74.412,8.535 73.592,8.535 73.243,8.535 73.139,8.431 73.139,7.389 73.243,7.285 76.385,7.285 ccw(c76.385,7.53) 76.63,7.53 76.63,17.949 ccw(c76.081,17.95) 76.469,18.338 76.059,18.748 ccw(c75.532,18.223) 75.531,18.967 74.019,18.967 72.69,17.638 cw(c72.092,18.236) 72.091,17.39 70.196,17.39 69.796,17.79 67.019,17.79 66.902,17.673
12V_EXP on L6_BOT "L6 BOT-12V_EXP 2" (solid, pour order 105): 62.447,4.509 ccw(c63.098,4.509) 63.098,3.858 65.91,3.858 67.03,3.858 ccw(c67.03,4.218) 67.39,4.218 67.39,5.378 cw(c67.94,5.378) 67.94,5.928 71.3,5.928 cw(c71.3,5.718) 71.51,5.718 71.51,4.868 ccw(c71.893,4.868) 71.893,4.485 74.645,4.485 ccw(c74.645,4.729) 74.817,4.557 ccw(c74.645,4.729) 74.889,4.729 74.889,5.491 ccw(c74.646,5.492) 74.817,5.664 ccw(c74.646,5.493) 74.645,5.735 cw(c74.645,5.894) 74.532,5.782 73.634,6.68 ccw(c72.554,5.601) 72.553,7.128 71.506,7.128 cw(c71.506,7.89) 70.968,7.351 69.899,8.419 cw(c70.372,8.892) 69.704,8.892 69.704,10.021 69.617,10.108 69.2,10.108 69.114,10.021 69.114,8.892 cw(c68.1,8.892) 68.817,8.175 68.059,7.417 cw(c67.673,7.803) 67.673,7.257 63.018,7.257 ccw(c63.018,6.686) 62.447,6.686
IR_LED_2_GND on L6_BOT "L6 BOT-IR_LED_2_GND" (solid, pour order 164): 71.7,19.518 71.7,17.89 70.856,17.89 cw(c70.856,18.758) 70.242,18.144 ccw(c69.854,17.757) 69.853,18.305 55.958,18.305 55.958,21.404 61.546,21.404 63.148,19.802 ccw(c63.834,20.488) 63.834,19.518
5V_EXP on L6_BOT "NONET_L-01_P-001" (solid, pour order 98): 18.991,28.074 19.463,28.545 19.466,28.545 19.466,29.442 18.92,29.988 16.52,29.988 15.859,29.326 15.859,26.365 15.666,26.172 12.96,26.172 12.925,26.137 12.925,25.664 16.296,25.664 18.224,27.593 18.224,28.253 18.516,28.545 18.988,28.074 18.995,28.074 19.466,28.545
NetD6_2 on L6_BOT "NONET_L-01_P-001" (solid, pour order 108): 68.434,8.554 68.347,8.468 62.987,8.468 ccw(c62.987,7.264) 62.135,8.115 61.19,7.169 ccw(c61.896,6.463) 60.897,6.463 60.897,5.387 cw(c60.628,5.387) 60.818,5.196 cw(c60.65,5.365) 60.649,5.127 58.594,5.127 cw(c58.594,5.374) 58.419,5.199 56.348,7.271 cw(c57.288,8.212) 55.958,8.212 55.958,11.295 65.172,11.295 cw(c65.172,10.42) 65.79,11.039 66.47,10.359 ccw(c67.076,10.965) 67.076,10.108 68.286,10.108 cw(c68.286,9.96) 68.391,10.064 cw(c68.286,9.96) 68.434,9.96
12V_EXP on L6_BOT "L6 BOT-12V_EXP" (solid, pour order 107): 36.375,4.508 ccw(c37.026,4.508) 37.026,3.858 39.838,3.858 40.958,3.858 ccw(c40.958,4.218) 41.318,4.218 41.318,5.378 cw(c41.868,5.378) 41.868,5.928 45.228,5.928 cw(c45.228,5.718) 45.438,5.718 45.438,4.868 ccw(c45.821,4.868) 45.821,4.485 48.573,4.485 ccw(c48.573,4.729) 48.745,4.556 ccw(c48.573,4.729) 48.817,4.729 48.817,5.491 ccw(c48.574,5.492) 48.745,5.664 ccw(c48.574,5.492) 48.573,5.735 cw(c48.573,5.894) 48.46,5.782 47.562,6.68 ccw(c46.481,5.6) 46.481,7.128 45.435,7.128 cw(c45.434,7.889) 44.896,7.351 43.827,8.419 cw(c44.3,8.892) 43.632,8.892 43.632,10.021 43.545,10.107 43.128,10.107 43.042,10.021 43.042,8.892 cw(c42.028,8.891) 42.745,8.175 42.293,7.723 cw(c41.943,8.072) 41.943,7.578 36.818,7.578 ccw(c36.818,7.135) 36.375,7.135
12V_EXP on L6_BOT "L6 BOT-12V_EXP 1" (solid, pour order 106): 36.375,4.508 ccw(c37.026,4.508) 37.026,3.858 39.838,3.858 40.958,3.858 ccw(c40.958,4.218) 41.318,4.218 41.318,5.378 cw(c41.868,5.378) 41.868,5.928 45.228,5.928 cw(c45.228,5.718) 45.438,5.718 45.438,4.868 ccw(c45.821,4.868) 45.821,4.485 48.573,4.485 ccw(c48.573,4.729) 48.745,4.556 ccw(c48.573,4.729) 48.817,4.729 48.817,5.491 ccw(c48.574,5.492) 48.745,5.664 ccw(c48.574,5.492) 48.573,5.735 cw(c48.573,5.894) 48.46,5.782 47.562,6.68 ccw(c46.481,5.6) 46.481,7.128 45.435,7.128 cw(c45.434,7.889) 44.896,7.351 43.827,8.419 cw(c44.3,8.892) 43.632,8.892 43.632,10.021 43.545,10.107 43.128,10.107 43.042,10.021 43.042,8.892 cw(c42.028,8.891) 42.745,8.175 42.293,7.723 cw(c41.943,8.072) 41.943,7.578 36.818,7.578 ccw(c36.818,7.135) 36.375,7.135
IR_LED_1_P on L6_BOT "L6 BOT-IR_LED_1_P" (solid, pour order 139): 40.83,17.107 40.947,16.99 41.967,16.99 cw(c41.967,16.211) 42.518,16.762 cw(c41.255,15.498) 43.042,15.498 43.042,13.885 ccw(c43.189,13.885) 43.085,13.781 ccw(c43.189,13.885) 43.189,13.737 43.545,13.737 43.632,13.824 43.632,15.23 43.64,15.238 43.64,16.19 43.865,16.414 47.244,16.414 48.822,17.991 48.822,18.868 48.723,18.967 47.947,18.967 46.37,17.39 44.124,17.39 43.724,17.79 40.947,17.79 40.83,17.673
efuse_STX_12V on L6_BOT "NONET_L-01_P-001" (solid, pour order 92): 18.516,10.748 18.516,8.936 15.571,5.991 15.571,4.63 20.796,4.63 22.14,5.974 22.14,11.622 21.814,11.948 20.662,11.948 18.989,10.275
12V_MOTOR_eFuse on L6_BOT "NONET_L-01_P-001" (solid, pour order 95): 18.516,19.543 18.516,17.731 15.62,14.835 15.62,13.423 21.616,13.423 22.14,13.948 22.14,20.417 21.814,20.743 20.662,20.743 18.989,19.07
5V_SLN_HD_eFuse on L6_BOT "NONET_L-01_P-001" (solid, pour order 96): 18.516,28.165 18.516,26.478 15.592,23.554 15.592,22.2 21.77,22.2 22.14,22.57 22.14,29.039 21.814,29.365 20.662,29.365 18.989,27.692
STX_12V on L6_BOT "NONET_L-01_P-001" (solid, pour order 97): 18.991,19.357 19.463,19.828 19.466,19.828 19.466,20.725 18.511,21.68 16.627,21.68 ccw(c16.627,20.911) 15.859,20.911 15.859,17.648 15.625,17.414 12.919,17.414 12.74,17.235 12.74,17.018 12.925,16.833 16.182,16.833 18.224,18.876 18.224,19.536 18.516,19.828 18.988,19.357 18.995,19.357 19.466,19.828
GND on L2_GND "GND_L02_P186" (solid, pour order 186): 0,12.33 cw(c0.8,12.33) 0.8,13.13 1,13.13 ccw(c1,13.93) 1.8,13.93 1.8,77.35 ccw(c1,77.35) 1,78.15 0.8,78.15 cw(c0.8,78.95) 0,78.95 0,86.8 cw(c3.2,86.8) 3.193,90 3.175,90 19.989,90 cw(c19.989,89.2) 20.789,89.2 ccw(c21.589,89.2) 21.589,88.4 21.59,88.399 42.015,88.4 71.399,88.4 71.389,88.4 ccw(c71.389,89.2) 72.189,89.2 cw(c72.989,89.2) 72.989,90 89.789,90 89.807,90 cw(c89.8,86.8) 93,86.807 93,77.307 cw(c92.2,77.307) 92.2,76.507 ccw(c92.2,75.707) 91.4,75.707 91.4,14.8 ccw(c92.2,14.8) 92.2,14 cw(c92.2,13.2) 93,13.2 93,3.2 cw(c89.8,3.2) 89.8,0 73,0 cw(c73,0.8) 72.2,0.8 ccw(c71.4,0.8) 71.4,1.6 71.399,1.6 50.975,1.6 21.59,1.6 21.6,1.6 ccw(c21.6,0.8) 20.8,0.8 cw(c20,0.8) 20,0 3.2,0 cw(c3.2,3.2) 0,3.2
GND on L5_GND "GND_L05_P250" (solid, pour order 250): 0,12.33 cw(c0.8,12.33) 0.8,13.13 1,13.13 ccw(c1,13.93) 1.8,13.93 1.8,77.35 ccw(c1,77.35) 1,78.15 0.8,78.15 cw(c0.8,78.95) 0,78.95 0,86.8 cw(c3.2,86.8) 3.193,90 3.175,90 19.989,90 cw(c19.989,89.2) 20.789,89.2 ccw(c21.589,89.2) 21.589,88.4 21.59,88.399 42.015,88.4 71.399,88.4 71.389,88.4 ccw(c71.389,89.2) 72.189,89.2 cw(c72.989,89.2) 72.989,90 89.789,90 89.807,90 cw(c89.8,86.8) 93,86.807 93,77.307 cw(c92.2,77.307) 92.2,76.507 ccw(c92.2,75.707) 91.4,75.707 91.4,14.8 ccw(c92.2,14.8) 92.2,14 cw(c92.2,13.2) 93,13.2 93,3.2 cw(c89.8,3.2) 89.8,0 73,0 cw(c73,0.8) 72.2,0.8 ccw(c71.4,0.8) 71.4,1.6 71.399,1.6 50.975,1.6 21.59,1.6 21.6,1.6 ccw(c21.6,0.8) 20.8,0.8 cw(c20,0.8) 20,0 3.2,0 cw(c3.2,3.2) 0,3.2

## Keep-outs
Keep-Out Layer:
  lines w0.2: 1.8,77.35 1.8,13.93 cw(c1,13.93) 1,13.13 0.8,13.13 ccw(c0.8,12.33) 0,12.33 0,3.2 ccw(c3.2,3.2) 3.2,0 19.99,0 ; 1.8,77.35 ccw(c1,77.35) 1,78.15 0.8,78.15 cw(c0.8,78.95) 0,78.95 0,86.8 cw(c3.2,86.8) 3.193,90 ; 3.175,90 19.964,90 ; 19.989,90 cw(c19.989,89.2) 20.789,89.2 ccw(c21.589,89.2) 21.589,88.4 ; 20,0 ccw(c20,0.8) 20.8,0.8 cw(c21.6,0.8) 21.6,1.6 ; 21.59,1.6 50.975,1.6 71.399,1.6 cw(c71.4,0.8) 72.2,0.8 ccw(c73,0.8) 73,0 ; 21.59,88.399 42.015,88.4 71.399,88.4 ; 71.389,88.4 ccw(c71.389,89.2) 72.189,89.2 cw(c72.989,89.2) 72.989,90 ; 73,90 89.789,90 ; 73.025,0 89.815,0 ; 89.8,0 ccw(c89.8,3.2) 93,3.2 93,13.2 ccw(c92.2,13.2) 92.2,14 cw(c92.2,14.8) 91.4,14.8 ; 89.807,90 cw(c89.8,86.8) 93,86.807 93,77.307 cw(c92.2,77.307) 92.2,76.507 ccw(c92.2,75.707) 91.4,75.707 ; 91.4,14.8 91.4,75.707

## Other copper
L1_TOP:
  pour cut-out: 30.9,51.6 30.898,51.598 30.898,50.766 31.774,49.891 33.388,49.891 33.53,50.033 33.53,51.574
  pour cut-out: 52.868,80.859 54.721,79.006 55.133,79.006 55.223,79.096 55.223,81.511 55.222,81.512 52.864,81.512
  pour cut-out: 29.1,20.6 29.074,20.574 29.074,19.5 31.874,19.5 34.2,21.826 34.2,22.208 34.008,22.4 32.323,22.4 30.523,20.6
  pour cut-out: 63.5,81.9 68.9,81.9 68.9,80.599 68.476,80.175 63.519,80.175 63.5,80.194
  pour cut-out: 25.915,53.202 25.915,48.385 26.086,48.214 27.148,48.214 27.392,48.458 27.392,52.948 27.12,53.22
  pour cut-out: 81.7,53.4 81.835,53.265 86.495,53.265 86.766,53.535 86.766,54.352 86.429,54.688 81.71,54.688
  pour cut-out: 61.622,72.009 58.667,69.054 58.667,60.65 63.494,55.823 73.063,55.823 79.76,62.52 79.76,70.11 78.056,71.813
  pour cut-out: 67.1,49.4 67.22,49.28 67.22,46.709 64.445,43.935 60.015,43.935 59.089,44.86 59.089,54.475 59.344,54.73 61.168,54.73 61.168,54.725 66.495,49.398
  pour cut-out: 84.879,45.382 86.3,43.961 86.3,40.75 87.099,39.951 87.099,39.146 86.717,38.764 82.876,38.764 82.4,39.24 82.4,44.884 82.898,45.382
  pour cut-out: 68.1,81.1 69.863,82.863 81.033,82.863 83.1,80.796 83.1,77.893 81.646,76.439 69.794,76.439 68.084,78.15
  pour cut-out: 67.4,27.014 67.4,20.824 62.274,20.824 62.194,20.744 56.652,20.744 55.949,20.041 55.579,20.041 55.038,20.581 55.038,21.015 54.793,21.26 53.728,21.26 53.493,21.495 53.493,22.149 53.744,22.4 55.008,22.4 55.711,23.103 55.711,23.841 55.87,24 56.802,24 56.867,24.066 56.867,24.55 56.366,25.052 56.366,25.773 56.182,25.773 55.711,26.244 55.711,28.275 54.236,29.75 54.236,30.5 63.914,30.5
  pour cut-out: 58.6,13.548 58.588,13.536 57.614,13.536 57.55,13.6 57.55,13.74 56.896,13.74 56.8,13.836 56.8,19.467 56.935,19.602 57.546,19.602 57.546,14.738 58.6,13.684
  pour cut-out: 36.902,9.239 37.947,9.239 38.131,9.055 38.131,5.904 37.651,5.425 37.176,5.425 36.902,5.7
  pour cut-out: 39.1,7.8 40.852,7.8 44.16,11.108 45.666,11.108 45.666,13.47 46.234,14.038 46.438,14.038 46.438,10.887 41.402,5.85 39.257,5.85 39.1,6.007
  pour cut-out: 40.478,17.934 43.1,17.934 43.1,19.488 43.168,19.556 45.821,19.556 46.013,19.748 46.372,19.748 46.693,20.068 46.963,20.068 48.138,21.244 52.904,21.244 53.024,21.364 53.024,22.267 40.8,22.267 40.539,22.006 40.539,17.995
  pour cut-out: 24.809,8.526 24.809,7.641 25.262,7.187 26.092,7.187 26.092,8.52
  pour cut-out: 12.9,14.2 12.9,12.498 13.103,12.295 14.845,12.295 15.06,12.51 15.06,13.024 13.85,14.234 12.897,14.234
  pour cut-out: 12.897,17.6 10.19,17.6 10.1,17.51 10.1,13.04 10.37,12.77 12.12,12.77 12.12,14.511 12.897,15.288
  pour cut-out: 13.318,27.496 10.225,27.496 10.225,23.205 10.418,23.013 13.318,23.013
  pour cut-out: 58.405,76.615 56.015,76.615 55.9,76.5 55.9,75.305 57.084,74.121 58.982,74.121 58.982,76.038
  pour cut-out: 42.35,76.55 42.35,75.015 42.975,74.39 46.439,74.39 46.8,74.751 46.8,76.458 46.795,76.463
  pour cut-out: 42.132,71.9 44.5,69.532 44.5,68.765 41.465,65.73 39.667,65.73 38.7,66.697 38.7,70.322 40.278,71.9
  pour cut-out: 37.4,52.9 37.4,60.851 38.359,61.81 43.397,61.81 44.171,61.036 44.171,53.277 43.822,52.927
  pour cut-out: 11.604,80.309 10.1,80.309 10.1,57.97 10.469,57.601 16.084,57.601 16.608,58.125 16.608,59.18 37.895,59.18 37.895,61.023 35.87,61.023 35.87,67.97 42.833,74.933 42.833,80.948 40.281,83.5 14.795,83.5
L6_BOT:
  pour cut-out: 45.198,63.402 45.211,63.389 45.211,58.64 46.39,57.461 46.39,56.876 46.375,56.861 42.424,56.861 41.804,57.481 41.804,60.808 42.811,61.815 44.402,63.406
  pour cut-out: 37.4,49.6 38.192,50.392 38.9,50.392 38.9,48.122 37.493,48.122 37.4,48.214
  pour cut-out: 72.601,30.888 72.601,30.003 72.921,29.683 77.715,29.683 78.522,30.49 78.522,30.859 78.527,30.864 78.502,30.888
  pour cut-out: 74.354,43.123 74.354,42.843 70.978,39.467 70.978,43.132
  pour cut-out: 64.9,82.6 64.9,82.846 64.896,82.85 65.046,83 79.473,83 80.012,83.538 82.128,83.538 83.266,82.4 85.18,82.4 85.189,82.391 85.189,76.751 84.937,76.5 81.255,76.5 79.155,78.6 65.44,78.6 64.896,79.143 64.896,81.8
  pour cut-out: 29.3,26.5 30.547,26.5 30.928,26.119 30.928,24.651 32.433,23.147 33.234,23.147 33.234,21.566 33.189,21.521 28.588,21.521 28.375,21.734 28.375,26.238 28.632,26.494
  pour cut-out: 48.7,80.6 49.2,81.1 54.395,81.1 54.5,80.995 54.5,80.075 55.075,79.5 55.075,78.15 49.575,78.15 48.716,79.009
  pour cut-out: 31.9,29.5 33.342,29.5 33.632,29.21 33.632,28.362 33.558,28.288 32.052,28.288 31.915,28.425
  pour cut-out: 68.691,8.291 67.817,7.417 62.753,7.417 62.344,7.008 62.344,4.816 60.861,4.816 60.861,5.088 61.16,5.387 61.16,6.928 62.523,8.291
  pour cut-out: 82.7,64.6 88,64.6 88.42,64.18 88.42,55.77 87.175,54.525 87.175,47.011 86.902,46.738 84.184,46.738 82.553,48.369 82.553,64.453
  pour cut-out: 51.2,11 51.173,11.027 50.7,11.027 50.7,10.564 50.702,10.561 50.702,7.643 50.277,7.218 47.908,7.218 47.756,7.065 47.756,6.774 49.873,4.658 54.495,4.658 54.5,4.663 54.5,11.246 54.4,11.346 52.404,11.346 52.404,9.375 53.91,9.375 53.988,9.297 53.988,8.35 51.29,8.35 51.202,8.439 51.202,10.96
  pour cut-out: 44.7,30.1 47.4,30.1 47.561,30.261 47.561,30.764 45.725,32.6 44.7,32.6
  pour cut-out: 43.4,35.288 49.538,29.149 49.969,29.149 49.969,34.156 50.013,34.2 47.713,36.5 43.4,36.5
  pour cut-out: 35.199,31.414 35.294,31.494 36.321,31.494 36.522,31.294 36.522,29.38 36.345,29.204 35.199,29.204
  pour cut-out: 50.666,25.943 50.968,25.641 52.052,25.641 54.093,23.6 69.737,23.6 70.2,24.063 70.2,40.807 69.516,41.491 59.249,41.491 54.9,37.142 54.9,32.541 52.794,30.434 50.666,30.434
  pour cut-out: 25.6,36.2 25.068,36.2 24.386,35.517 24.16,35.517 24.152,35.51 24.152,34.762 24.183,34.731 24.747,34.731 24.747,34.565 25.072,34.239 25.6,34.239
  pour cut-out: 24.25,38.6 24.372,38.6 25.072,37.9 25.6,37.9 25.6,41.81 25.487,41.923 24.245,41.923 24.16,41.837 24.16,38.69
  pour cut-out: 21.109,45.659 21.109,49.368 21.265,49.524 24.665,49.524 25.29,48.898 25.29,46.214 24.735,45.659
  pour cut-out: 46.075,52.4 48.681,52.4 48.794,52.287 48.794,50.1 49.414,50.1 50.127,49.387 50.127,47.092 49.624,46.589 46.37,46.589 46.075,46.884
  pour cut-out: 12.951,83 12.951,57.609 37.141,57.609 39.26,59.728 39.26,83
  pour cut-out: 21.4,57 21.2,57.2 15.206,57.2 14.757,56.75 14.757,51.799 15.866,50.689 21.252,50.689 21.377,50.814

## Silkscreen, mask and mechanical layers (free items; w line width, h text height)
Top Overlay:
  drawing of 37 lines, arcs and shapes, not listed
  text "FLOW 1" at 53.2,81.912 h1
  text "BATTERY" at 7.2,81.5 h1
  text "SOLENOID 1 - 4" at 82.5,80.112 h1
  text "HD4 CH 1-2" at 18.275,79.712 h1
  text "CAM 2" at 82.599,69.312 h1
  text "NTC" at 82.888,53.9 h1 r90
  text "MOTOR 2" at 79.8,39.012 h1
  text "LIMIT - L" at 79.7,21.826 h1
  text "IR LED 1" at 87.5,10.6 h1
  text "12V_EXP" at 40.76,4.2 h1 r90
  text "12V_MOTOR" at 41.862,4.2 h1 r90
  text "5V_SLN_HD" at 42.963,4.2 h1 r90
  text "5V_EXP" at 44.053,4.2 h1 r90
  text "3.3V_COM" at 45.155,4.2 h1 r90
  text "3.3V_MOTOR" at 46.258,4.2 h1 r90
  text "3.3V_MCU" at 47.36,4.2 h1 r90
Bottom Overlay:
  drawing of 18 lines, arcs and shapes, not listed
  text "HD4 CH 3-4" at 25.3,79.312 h1
  text "HD CH 1" at 42,79.312 h1
  text "FLOW 2" at 67.5,79.312 h1
  text "SOLENOID 5 - 8" at 84.5,79.313 h1
  text "CAM 1" at 85.176,69.312 h1
  text "HEATER" at 83.3,53.1 h1
  text "MOTOR 1" at 83.3,49.912 h1
  text "NC" at 62.5,47.112 h1
  text "3V3_MCU" at 62.5,44.473 h1
  text "GND" at 62.5,41.962 h1
  text "TRACESWO" at 62.5,39.451 h1
  text "TSWCLK" at 62.5,36.941 h1
  text "nRESET" at 62.5,34.434 h1
  text "NC" at 62.5,31.923 h1
  text "SWDIO" at 62.5,29.412 h1
  text "BEE-DAL_EXP V1.0" at 75.838,27.032 h1.2
  text "Checked by: Bao Bui" at 76.205,25.708 h1.2
  text "Approved by: Vu Pham" at 76.806,24.386 h1.2
  text "Designed by: Duy Nguyen" at 77.523,23.057 h1.2
  text "LIMIT - U" at 83.467,21.826 h1
  text "IR LED 2" at 90.962,10.5 h1

## Text inside footprints (layer, text, board x,y; h text height)
U17: Top Assembly "*" at 64.735,73.161 h1 r270
U35: Top Assembly "*" at 73.082,77.681 h1